# Altium PCB mbed_board.PcbDoc
Units mm, origin at the board's own origin, x right, y up, seen from the top; angles counter-clockwise.
Board outline 84.1 x 66.43 mm, 2 copper layers (Top Layer, Bottom Layer); 18 components, 43 nets, 157 pads, 27 vias.
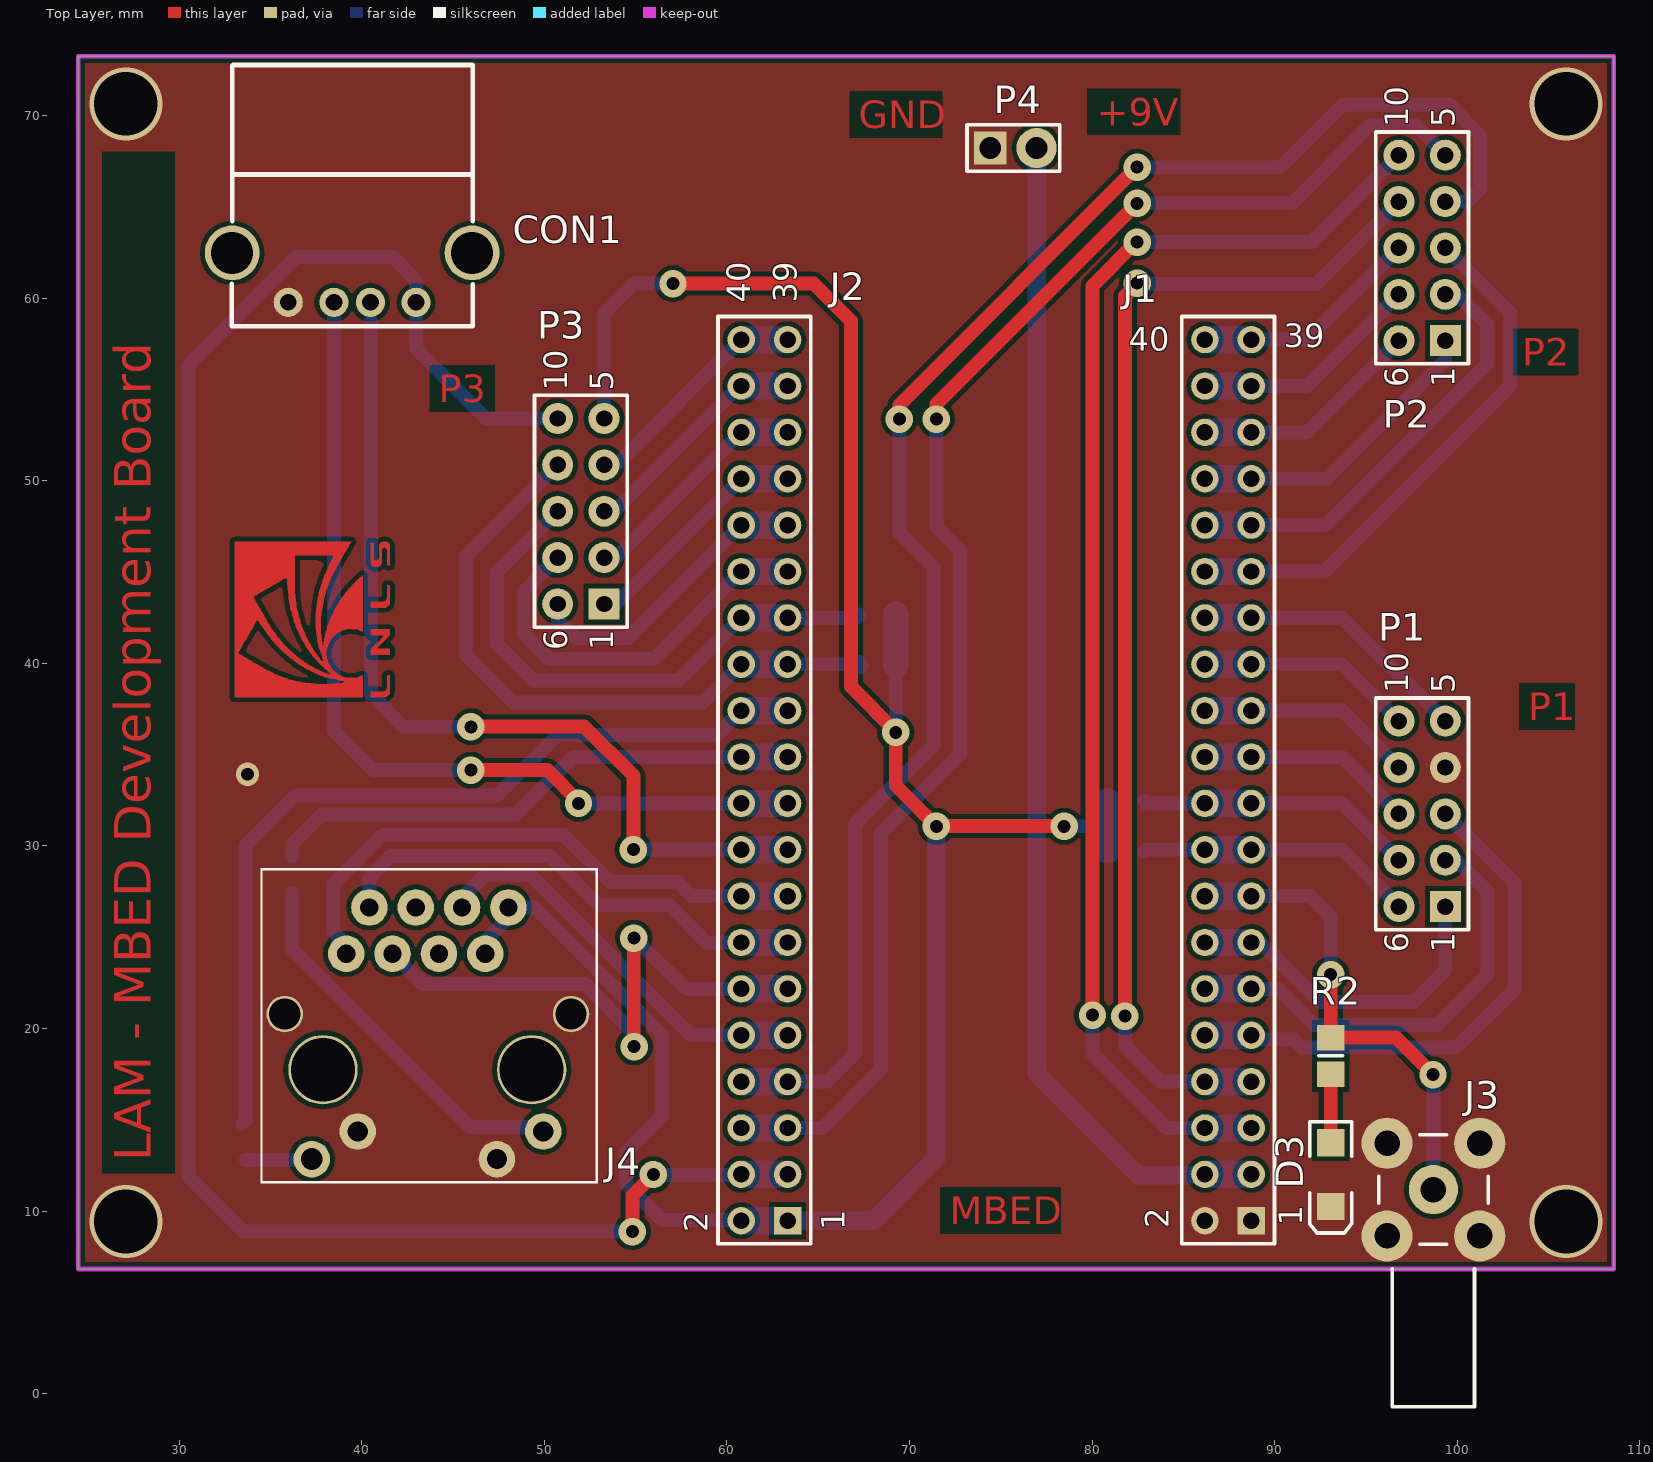
[diagram p0: Top Layer view]
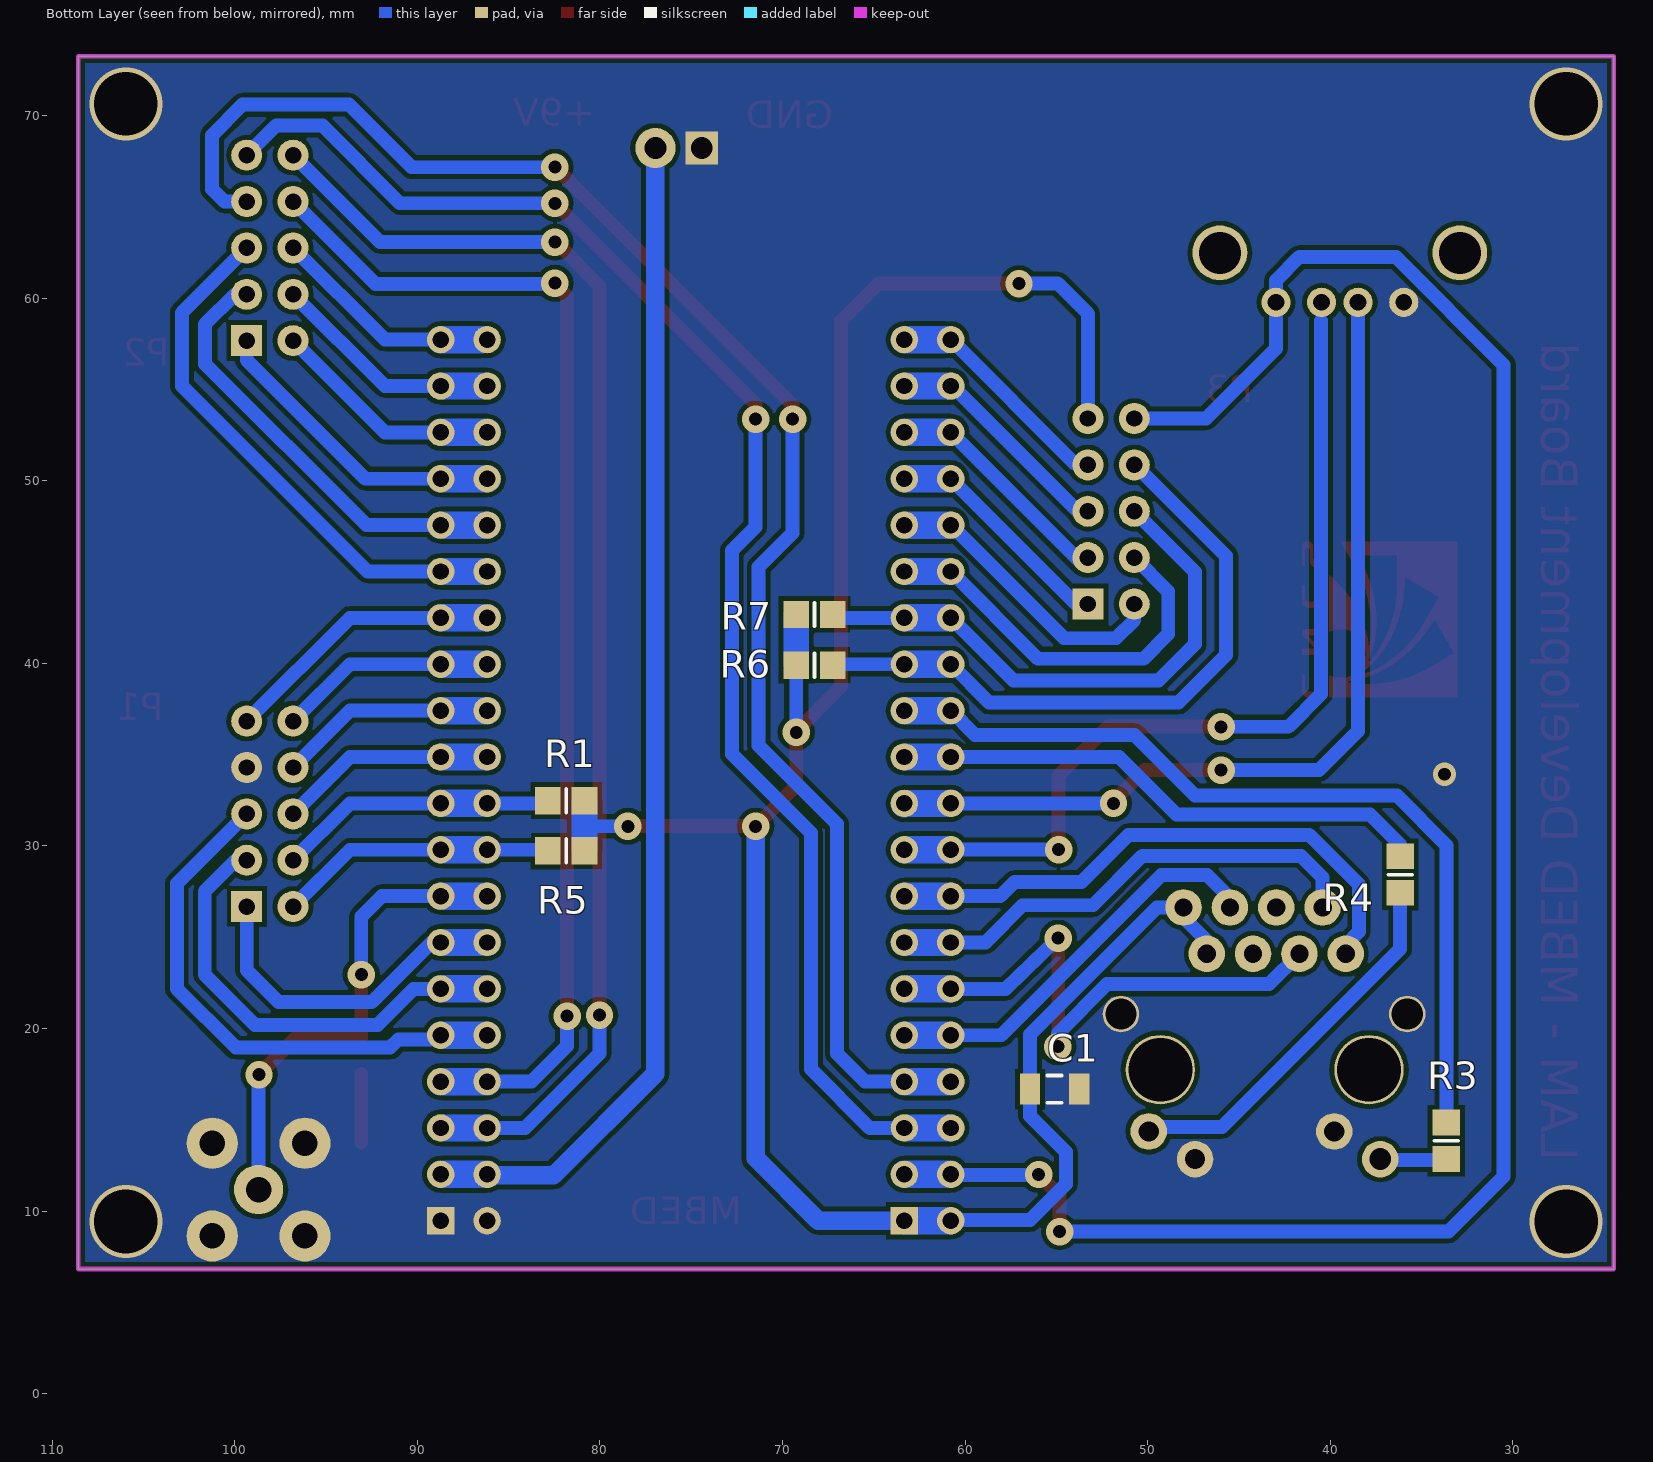
[diagram p1: Bottom Layer view, seen from below]

## Layer stack, top to bottom
Top Layer: signal copper 0.0356
Dielectric: dielectric 0.32, FR-4, Dk 4.8
Bottom Layer: signal copper 0.0356

## Board outline
24.475,6.825 24.475,73.25 108.575,73.25 108.575,6.825

## Design rules (kind name [scope] priority, off if disabled: settings)
Clearance [All] p1: gap=0.254
PlaneConnect [All] p1: planeconnectstyle=Direct reliefexpansion=0.508 reliefentries=4 reliefconductorwidth=0.254 reliefairgap=0.254
PolygonConnect [All] p1: connectstyle=Direct reliefconductorwidth=0.254 reliefentries=4 polygonreliefangle="90 Angle" airgapwidth=0.254
RoomDefinition General_Controller [InComponentClass('General_Controller')] p1: confinementstyle=ConfineIn formatcopy=TRUE lockcomponents=FALSE outline -24.486,-45.8 183.164,-45.8 183.164,132.264 -24.486,132.264
RoutingVias [All] p1: holewidth=0.711 width=1.27 viastyle="Through Hole" minholewidth=0.711 minwidth=1.27 maxholewidth=0.711 maxwidth=1.27
SilkToSolderMaskClearance SilkscreenOverComponentPads [IsPad] p1: minsilkscreentomaskgap=0.254 clearancetoexposedcopper=TRUE
SolderMaskExpansion [All] p1: expansion=0.102
Width [All] p1: maxlimit=2 minlimit=0.254 preferedwidth=0.508
26 further rules are at their usual default settings.

## Components (designator, comment, footprint, x,y, rotation, side; value= is the part's Value field where it differs from the comment)
C1 "Cap Pol3" C1206 55.1,16.675 r180 bottom
CON1 "USBS1ARW-LF" USB_CON_A 39.475,59.775 r0 top
D3 "LED2" 3.2X1.6X1.1 93.075,12 r270 top locked
J1 "Header 20X2" HDR2X20 88.725,9.47 r90 top locked
J2 "Header 20X2" HDR2X20 63.325,9.47 r90 top locked
J3 "CONN SMA" SMA 98.7,11.175 r90 top
J4 "RJ45_J0006D21BNL" RJ45_J0006D21BNL 43.25,19.875 r90 top locked
P1 "Header 5X2A" HDR2X5_CEN#1 99.35,26.675 r90 top
P2 "Header 5X2A" HDR2X5_CEN#1 99.35,57.675 r90 top
P3 "Header 5X2A" HDR2X5_CEN#2 53.275,43.25 r90 top
P4 "Header 2" HDR1X2 74.425,68.225 r0 top
R1 "Res1" 6-0805_M 81.85,32.475 r0 bottom
R2 "Res1" 6-0805_M 93.075,18.5 r270 top locked
R3 "Res1" 6-0805_M 33.65,13.85 r270 bottom
R4 "Res1" 6-0805_M 36.175,28.425 r270 bottom
R5 "Res1" 6-0805_M 81.85,29.725 r0 bottom
R6 "Res1" 6-0805_M 68.25,39.9 r180 bottom
R7 "Res1" 6-0805_M 68.25,42.675 r180 bottom

## Footprints (in the part's own frame and the unit in brackets; to place one, negate y for a bottom-side part, rotate by r counter-clockwise, add the part's x,y. Pads: shape width x height; smd on the part's side, far side on the other; paste and mask are expansions set on the pad)
3.2X1.6X1.1 [mm] "SMT LED; 2 Flat Leads"
  rect 1.5x1.5 smd: 1(-1.75,0) 2(1.75,0)
  silkscreen extent -2.9,-1.15 3.2,1.15
6-0805_M [mm] "Chip Resistor, Body 2.0x1.2mm, IPC Low Density"
  rect 1.4x1.5 smd: 1(-1,0) 2(1,0)
  silkscreen extent 0,-0.65 0,0.65, body extent -1.07,-0.7 1.07,0.7, height 0.7
C1206 [mm] "Chip Capacitor, Body 3.2x1.6mm, IPC High Density"
  rect 1.1x1.7 smd: 1(-1.35,0) 2(1.35,0)
  silkscreen extent -0.4,-0.75 0.4,0.75, body extent -1.7,-0.9 1.7,0.9, height 1.3
HDR1X2 [mm] "Connector; Header; 2 Position"
  rect 1.8x1.8 hole 1.2: 1(0,0)
  round 2.2 hole 1.2: 2(2.54,0)
  silkscreen extent -1.27,-1.27 3.81,1.27
HDR2X5_CEN#1 [mm] "Connector; Header; 5x2 Position"
  rect 1.7x1.7 hole 0.9 unplated: 1(0,0)
  round 1.7 hole 0.9 unplated: 2(2.54,0) 3(5.08,0) 4(7.62,0) 5(10.16,0) 6(0,2.54) 7(2.54,2.54) 8(5.08,2.54) 9(7.62,2.54) 10(10.16,2.54)
  silkscreen extent -1.27,-1.27 11.43,3.81
HDR2X5_CEN#2 [mm] "Connector; Header; 5x2 Position"
  rect 1.7x1.7 hole 0.9: 1(0,0)
  round 1.7 hole 0.9: 2(2.54,0) 3(5.08,0) 4(7.62,0) 5(10.16,0) 6(0,2.54) 7(2.54,2.54) 8(5.08,2.54) 9(7.62,2.54) 10(10.16,2.54)
  silkscreen extent -1.27,-1.27 11.43,3.81
HDR2X20 [mm] "Connector; Header; 20x2 Position"
  rect 1.5x1.5 hole 0.9: 1(0,0)
  round 1.5 hole 0.9: 2(0,2.54) 3(2.54,0) 4(2.54,2.54) 5(5.08,0) 6(5.08,2.54) 7(7.62,0) 8(7.62,2.54) 9(10.16,0) 10(10.16,2.54) 11(12.7,0) 12(12.7,2.54) 13(15.24,0) 14(15.24,2.54) 15(17.78,0) 16(17.78,2.54) 17(20.32,0) 18(20.32,2.54) 19(22.86,0) 20(22.86,2.54) 21(25.4,0) 22(25.4,2.54) 23(27.94,0) 24(27.94,2.54) 25(30.48,0) 26(30.48,2.54) 27(33.02,0) 28(33.02,2.54) 29(35.56,0) 30(35.56,2.54) 31(38.1,0) 32(38.1,2.54) 33(40.64,0) 34(40.64,2.54) 35(43.18,0) 36(43.18,2.54) 37(45.72,0) 38(45.72,2.54) 39(48.26,0) 40(48.26,2.54)
  silkscreen extent -1.27,-1.27 49.53,3.81
RJ45_J0006D21BNL [mm]
  round 2 hole 1: 1(4.216,4.102) 2(6.756,2.832) 3(4.216,1.562) 4(6.756,0.292) 5(4.216,-0.978) 6(6.756,-2.248) 7(4.216,-3.518) 8(6.756,-4.788)
  round 2 hole 1.2: 9(-7.034,5.986)
  round 2 hole 1.1: 10(-5.515,3.467) 11(-7.034,-4.153) 12(-5.515,-6.693)
  round 2 hole 1.7: 13(0.915,7.468) 14(0.915,-8.214)
  round 3.8 hole 3.5: 15(-2.134,5.372) 16(-2.134,-6.058)
  silkscreen extent -8.35,-9.68 8.92,8.8
SMA [mm] "Connector; RF Coaxial, MCX, Thru-Hole; 5 Position; Right-Angle"
  round 2.8 hole 1.4: 1(2.54,2.54) 2(2.54,-2.54) 3(-2.54,-2.54) 4(-2.54,2.54)
  round 2.7 hole 1.4: 5(0,0)
  silkscreen extent -11.9,-3 3,3, body extent -12.58,-3.42 3.4,3.45, height 13.5
USB_CON_A [mm]
  round 1.6 hole 0.92: 1(3.5,0) 2(1,0) 3(-1,0) 4(-3.5,0)
  round 3 hole 2.3: 5(-6.57,2.71) 6(6.57,2.71)
  silkscreen extent -6.6,-1.3 6.6,13, body extent -8.12,-0.97 8.12,13.03, height 7.67

## Part data
C1: "Polarized Capacitor (Surface Mount)"
CON1: library part CON_USB_A, "USB connector A type (Maritex)"
D3: "Typical RED, GREEN, YELLOW, AMBER GaAs LED"
J1 J2: "Header, 20-Pin, Dual row"
J3: library part SMA, "Connector; RF Coaxial, MCX, Thru-Hole; 5 Position; Right-Angle"
J4: "Connector Ethernet RJ45_J0006D21BNL"
P1 P2 P3: "Header, 5-Pin, Dual row"
P4: "Header, 2-Pin"
R1 R2 R3 R4 R5 R6 R7: "Resistor"

## Via types
v1: diameter 1.5, hole 0.711, Top Layer to Bottom Layer, 22 vias
v2: diameter 4, hole 3.5, Top Layer to Bottom Layer, 4 vias
v3: diameter 1.27, hole 0.711, Top Layer to Bottom Layer, 1 vias

## Nets (pads, with @x,y where several pads share a name; then routed paths per layer and width w, separated by ;. In a path a pad name is that pad's centre, name@x,y a point inside that pad or via, vN(x,y) a via of type N, cw(c..) or ccw(c..) an arc to the next point about the centre after c; other vN are vias at no path point)
GND: C1.2 CON1.4 D3.2 J1.1 J1.2 J3.1 J3.2 J3.3 J3.4 J4.10 J4.11 J4.13 J4.14 P1.4 P4.1
  other v2: 27.075,9.425 105.975,9.425 27.075,70.65 105.975,70.65
  other v3: 33.75,33.925
NetC1_1: C1.1 J2.1 J2.2 J4.7 J4.8 P3.5 R1.1 R5.1 R6.1 R7.1 | length 131.7
  Top Layer w0.762: v1(57.05,60.8) 64.75,60.8 66.8,58.75 66.8,38.725 v1@69.3,36.225 ; v1(69.25,36.225) 69.25,33.3 v1(71.475,31.075) 71.5,31.1 v1@78.475,31.1
  Bottom Layer w0.762: J4.7 46.768,24.818 48.038,26.088 J4.8 49.494,26.631 56.45,19.675 56.45,15.2 54.475,13.225 54.475,11.475 56.45,9.5 57.7,9.5 J2.2@60.425,9.5 ; P3.5 53.275,59.15 54.925,60.8 v1@57.175,60.8 ; v1(69.25,36.225) R6.1 ; v1(78.475,31.075) 80.85,31.075 R5.1 R5.1@80.85,30.1
  Bottom Layer w1.016: J2.2@60.425,9.5 60.785,9.5 J2.2@60.815,9.47 ; J2.1 68.045,9.47 71.475,12.9 v1(71.475,31.075)
  Bottom Layer w1.4: R6.1 R7.1 ; R5.1 R1.1
  Bottom Layer w1.5: J2.2@60.815,9.47 J2.1
NetCON1_1: CON1.1 J2.3 J2.4 P3.10 | length 109.5
  Top Layer w0.762: v1(54.825,8.875) 54.825,10.85 v1(55.975,12)
  Bottom Layer w0.762: P3.10 46.815,53.41 42.975,57.25 42.975,60.975 41.7,62.25 36.4,62.25 30.5,56.35 30.5,11.9 33.525,8.875 v1(54.825,8.875) ; v1@55.975,11.979 60.754,11.979 J2.4
  Bottom Layer w1.5: J2.4 J2.3
NetCON1_2: CON1.2 J2.17 J2.18 | length 49.2
  Top Layer w0.762: v1@45.975,36.375 46.15,36.55 52.175,36.55 54.875,33.85 v1(54.875,29.8)
  Bottom Layer w0.762: 40.5,58.75 40.5,38.325 42.3,36.525 v1(45.975,36.525) ; v1(54.875,29.8) J2.18@60.55,29.8
  Bottom Layer w1.016: J2.18@60.55,29.8 60.785,29.8 J2.18@60.795,29.79
  Bottom Layer w1.5: J2.18@60.795,29.79 J2.17
NetCON1_3: CON1.3 J2.19 J2.20 | length 50
  Top Layer w0.762: v1(45.975,34.15) 50.175,34.15 v1@51.935,32.39
  Bottom Layer w0.762: CON1.3 38.475,36.3 40.625,34.15 v1(45.975,34.15) ; v1(51.875,32.33) J2.20
  Bottom Layer w1.5: J2.20 J2.19@63.325,32.316
NetD3_1: D3.1 R2.2 | length 3.7
  Top Layer w0.762: D3.1 R2.2
NetJ1_3: J1.3 J1.4 P4.2 | length 64.8
  Bottom Layer w1.016: P4.2@76.975,68.225 76.975,17.525 82.55,11.95 86.125,11.95 J1.4
  Bottom Layer w1.5: J1.4 J1.3
NetJ1_5: J1.5 J1.6 P2.10 | length 72.3
  Top Layer w0.762: v1(80.025,20.725) 80.025,60.675 v1@82.45,63.1 ; P2.10@96.75,67.775 P2.10
  Bottom Layer w0.762: v1(80.025,20.725) 80.025,18.625 84.1,14.55 J1.6 ; v1(82.475,63.075) 92.05,63.075 P2.10
  Bottom Layer w1.5: J1.6 J1.5
NetJ1_7: J1.7 J1.8 P2.9 | length 66
  Top Layer w0.762: v1(81.8,20.675) 81.8,60.125 v1@82.488,60.812
  Bottom Layer w0.762: v1(81.8,20.675) 81.8,19.05 83.76,17.09 J1.8 ; v1@82.475,60.775 92.29,60.775 P2.9
  Bottom Layer w1.5: J1.8 J1.7
  other v1: 82.475,60.825
NetJ1_9: J1.9 J1.10 P1.3 | length 29.8
  Bottom Layer w0.762: J1.9 88.955,19.4 91.05,19.4 91.5,18.95 99.95,18.95 103.175,22.175 103.175,27.93 P1.3
  Bottom Layer w1.5: J1.10 J1.9
NetJ1_11: J1.11 J1.12 P1.2 | length 25
  Bottom Layer w0.762: J1.11 90.205,22.17 92.175,20.2 98.9,20.2 101.65,22.95 101.65,27.5 99.935,29.215 P1.2
  Bottom Layer w1.5: J1.12 J1.11
NetJ1_13: J1.13 J1.14 P1.1 | length 18.7
  Bottom Layer w0.762: J1.13 89.24,24.71 92.5,21.45 97.6,21.45 99.35,23.2 P1.1
  Bottom Layer w1.5: J1.14 J1.13
NetJ1_15: J1.15 J1.16 J3.5 R2.1 | length 26.7
  Top Layer w0.762: v1(93.075,22.95) R2.1 96.65,19.5 v1(98.675,17.475)
  Bottom Layer w0.762: J1.15 91.95,27.25 93.075,26.125 v1(93.075,22.95) ; v1(98.675,17.475) 98.7,17.45 J3.5
  Bottom Layer w1.5: J1.16 J1.15
NetJ1_17: J1.17 J1.18 P1.6 R5.2 | length 15.3
  Bottom Layer w0.762: R5.2 82.915,29.79 J1.18 ; J1.17 93.695,29.79 P1.6
  Bottom Layer w1.5: J1.18 J1.17
NetJ1_19: J1.19 J1.20 P1.7 R1.2 | length 15.3
  Bottom Layer w0.762: R1.2 82.995,32.33 J1.20 ; J1.19 93.695,32.33 P1.7
  Bottom Layer w1.5: J1.20 J1.19
NetJ1_21: J1.21 J1.22 P1.8 | length 11.9
  Bottom Layer w0.762: J1.21 93.695,34.87 P1.8
  Bottom Layer w1.5: J1.22 J1.21
NetJ1_23: J1.23 J1.24 P1.9 | length 11.9
  Bottom Layer w0.762: J1.23 93.695,37.41 P1.9
  Bottom Layer w1.5: J1.24 J1.23
NetJ1_25: J1.25 J1.26 P1.10 | length 11.9
  Bottom Layer w0.762: J1.25 93.695,39.95 P1.10
  Bottom Layer w1.5: J1.26 J1.25
NetJ1_27: J1.27 J1.28 P1.5 | length 15.5
  Bottom Layer w0.762: J1.27 93.695,42.49 P1.5
  Bottom Layer w1.5: J1.28 J1.27
NetJ1_29: J1.29 J1.30 P2.3 | length 30
  Bottom Layer w0.762: J1.29 92.73,45.03 102.9,55.2 102.9,59.205 P2.3
  Bottom Layer w1.5: J1.30 J1.29
NetJ1_31: J1.31 J1.32 P2.2 | length 24.4
  Bottom Layer w0.762: J1.31@88.87,47.425 J1.31 92.795,47.57 101.625,56.4 101.625,58.575 99.985,60.215 P2.2
  Bottom Layer w1.5: J1.32 J1.31
NetJ1_33: J1.33 J1.34 P2.1 | length 17.9
  Bottom Layer w0.762: 89.69,50.11 J1.33 92.835,50.11 99.35,56.625 P2.1
  Bottom Layer w1.5: J1.34 J1.33
NetJ1_35: J1.35 J1.36 P2.6 | length 12.7
  Bottom Layer w0.762: J1.35 91.785,52.65 P2.6
  Bottom Layer w1.5: J1.36 J1.35
NetJ1_37: J1.37 J1.38 P2.7 | length 12.7
  Bottom Layer w0.762: J1.37 91.785,55.19 P2.7
  Bottom Layer w1.5: J1.38 J1.37
NetJ1_39: J1.39 J1.40 P2.8 | length 14.9
  Bottom Layer w0.762: J1.40 86.196,57.741 88.714,57.741 J1.39 91.785,57.73 P2.8
  Bottom Layer w1.5: J1.40@86.499,57.73 J1.39
NetJ2_5: J2.5 J2.6 P2.5 | length 82.6
  Top Layer w0.762: v1(71.475,53.375) 71.475,54.2 v1(82.475,65.2)
  Bottom Layer w0.762: J2.5 65.225,14.55 68.45,17.775 68.45,30.7 72.775,35.025 72.775,46.175 71.475,47.475 v1(71.475,53.375) ; v1(82.475,65.2) 90.95,65.2 95.2,69.45 97.735,69.45 P2.5
  Bottom Layer w1.5: J2.6 J2.5
NetJ2_7: J2.7 J2.8 P2.4 | length 89.4
  Top Layer w0.762: v1(69.45,53.375) 69.45,54.15 v1(82.475,67.175)
  Bottom Layer w0.762: J2.7 65.49,17.09 66.7,18.3 67.025,18.625 67.025,31.2 71.325,35.5 71.325,45.275 69.45,47.15 v1(69.45,53.375) ; v1(82.475,67.175) 90.325,67.175 93.75,70.6 99.575,70.6 101.25,68.925 101.25,65.975 100.57,65.295 P2.4
  Bottom Layer w1.5: J2.8 J2.7
NetJ2_9: J2.9 J2.10 J4.6 | length 22.5
  Bottom Layer w0.762: J4.6 45.498,27.148 46.75,28.4 49.25,28.4 58.02,19.63 J2.10
  Bottom Layer w1.5: J2.10 J2.9
NetJ2_11: J2.11 J2.12 J4.3 | length 31.3
  Top Layer w0.762: v1@54.9,19 v1(54.9,24.95)
  Bottom Layer w0.762: J4.3 43.354,22.425 52.225,22.425 54.925,19.725 v1(54.925,19) ; v1(54.9,24.95) 57.78,22.17 J2.12
  Bottom Layer w1.5: J2.12 J2.11
NetJ2_13: J2.13 J2.14 J4.2 | length 27
  Bottom Layer w0.762: J4.2 40.418,28.268 41.6,29.45 50.3,29.45 53,26.75 56.85,26.75 58.89,24.71 J2.14 J2.14@60.785,24.753
  Bottom Layer w1.5: J2.14 J2.13
NetJ2_15: J2.15 J2.16 J4.1 | length 31.5
  Bottom Layer w0.762: J4.1 39.148,24.577 38.425,25.3 38.425,27.875 41.15,30.6 51.05,30.6 53.625,28.025 57.3,28.025 58.075,27.25 J2.16
  Bottom Layer w1.5: J2.16 J2.15
NetJ2_21: J2.21 J2.22 R4.1 | length 29.8
  Bottom Layer w0.762: R4.1 36.175,30.075 37.825,31.725 48.425,31.725 51.57,34.87 J2.22
  Bottom Layer w1.5: J2.22 J2.21
NetJ2_23: J2.23 J2.24 R3.1 | length 48
  Bottom Layer w0.762: R3.1@33.475,14.8 33.625,14.95 33.625,30.025 36.35,32.75 47.4,32.75 50.725,36.075 59.45,36.075 J2.24
  Bottom Layer w1.5: J2.24 J2.23
NetJ2_25: J2.25 J2.26 P3.9 R6.2 | length 36
  Bottom Layer w0.762: P3.9@50.695,50.87 45.7,45.875 45.7,40.45 48.3,37.85 58.685,37.85 J2.26 ; J2.25 R6.2@67.2,39.95
  Bottom Layer w1.016: R6.2@67.2,39.95 R6.2
  Bottom Layer w1.5: J2.26 J2.25
NetJ2_27: J2.27 J2.28 P3.8 R7.2 | length 30.8
  Bottom Layer w0.762: P3.8 47.4,44.995 47.4,41.05 49.4,39.05 57.345,39.05 J2.28 ; J2.27 67.065,42.49 R7.2
  Bottom Layer w1.5: J2.28 J2.27
NetJ2_29: J2.29 J2.30 P3.7 | length 21.9
  Bottom Layer w0.762: P3.7 48.875,43.93 48.875,41.6 50.225,40.25 56.005,40.25 J2.30
  Bottom Layer w1.5: J2.30 J2.29
NetJ2_31: J2.31 J2.32 P3.6 | length 16.5
  Bottom Layer w0.762: P3.6 50.735,42.365 51.725,41.375 54.59,41.375 J2.32
  Bottom Layer w1.5: J2.32 J2.31
NetJ2_33: J2.33 J2.34 P3.1 | length 12.7
  Bottom Layer w0.762: P3.1@53.6,42.925 J2.34
  Bottom Layer w1.5: J2.34 J2.33
NetJ2_35: J2.35 J2.36 P3.2 | length 12.7
  Bottom Layer w0.762: P3.2@53.6,45.465 J2.36
  Bottom Layer w1.5: J2.36 J2.35
NetJ2_37: J2.37 J2.38 P3.3 | length 12.9
  Bottom Layer w0.762: P3.3 53.825,48.33 60.685,55.19 J2.38
  Bottom Layer w1.5: J2.38 J2.37
NetJ2_39: J2.39 J2.40 P3.4 | length 12.5
  Bottom Layer w0.762: P3.4@53.275,50.975 54.03,50.975 J2.40
  Bottom Layer w1.5: J2.40@61.099,57.73 J2.39
NetJ4_9: J4.9 R3.2 | length 3.6
  Bottom Layer w0.762: R3.2@33.65,12.8 37.223,12.8 J4.9
NetJ4_12: J4.12 R4.2 | length 21
  Bottom Layer w0.762: R4.2 36.175,24.35 45.918,14.607 49.696,14.607 J4.12
pads on no net: CON1.5 CON1.6 J4.4 J4.5 J4.15 J4.16

## Polygon pours and split planes (outlines as drawn)
GND on Bottom Layer "RFsignal Bottom-No Net" (solid, pour order 4): 24.475,6.825 24.475,73.25 108.575,73.25 108.575,6.825 24.475,6.825
GND on Top Layer "RFsignal Bottom-No Net" (solid, pour order 2): 24.475,73.25 24.475,6.825 108.575,6.825 108.575,73.25 24.475,73.25

## Keep-outs
Keep-Out Layer:
  the board outline again, w0.254

## Other copper
Top Layer:
  region: 40.646,46.604 40.646,45.705 40.668,45.705 40.668,45.684 40.689,45.684 40.689,45.662 40.711,45.662 40.711,45.641 40.732,45.641 40.732,45.619 40.86,45.619 40.86,45.641 40.882,45.641 40.882,45.662 40.903,45.662 40.903,45.684 40.925,45.684 40.925,45.705 40.946,45.705 40.946,46.454 40.967,46.454 40.967,46.518 40.989,46.518 40.989,46.539 41.01,46.539 41.01,46.582 41.032,46.582 41.032,46.604 41.053,46.604 41.053,46.625 41.096,46.625 41.096,46.646 41.138,46.646 41.138,46.668 41.352,46.668 41.352,46.646 41.395,46.646 41.395,46.625 41.438,46.625 41.438,46.604 41.459,46.604 41.459,46.582 41.481,46.582 41.481,46.539 41.502,46.539 41.502,46.497 41.524,46.497 41.524,46.411 41.545,46.411 41.545,45.363 41.395,45.363 41.395,46.24 41.374,46.24 41.374,46.283 41.352,46.283 41.352,46.304 41.331,46.304 41.331,46.325 41.288,46.325 41.288,46.347 41.267,46.347 41.267,46.368 41.181,46.368 41.181,46.325 41.138,46.325 41.138,46.304 41.117,46.304 41.117,46.261 41.096,46.261 41.096,45.491 41.074,45.491 41.074,45.427 41.053,45.427 41.053,45.406 41.032,45.406 41.032,45.363 40.989,45.363 40.989,45.341 40.946,45.341 40.946,45.32 40.925,45.32 40.925,45.299 40.86,45.299 40.86,45.277 40.732,45.277 40.732,45.299 40.668,45.299 40.668,45.32 40.646,45.32 40.646,45.341 40.582,45.341 40.582,45.363 40.561,45.363 40.561,45.384 40.539,45.384 40.539,45.427 40.518,45.427 40.518,45.491 40.497,45.491 40.497,46.604
  region: 41.203,43.373 41.203,43.395 41.31,43.395 41.31,43.416 41.331,43.416 41.331,43.437 41.352,43.437 41.352,43.459 41.374,43.459 41.374,43.566 41.395,43.566 41.395,44.272 41.545,44.272 41.545,43.373 41.524,43.373 41.524,43.245 41.502,43.245 41.502,43.202 41.481,43.202 41.481,43.181 41.459,43.181 41.459,43.159 41.438,43.159 41.438,43.138 41.417,43.138 41.417,43.117 41.395,43.117 41.395,43.095 41.352,43.095 41.352,43.074 41.288,43.074 41.288,43.052 40.497,43.052 40.497,43.373
  region: 40.518,38.474 40.518,38.453 41.181,38.453 41.181,38.474 41.31,38.474 41.31,38.517 41.331,38.517 41.331,38.538 41.352,38.538 41.352,38.56 41.374,38.56 41.374,38.624 41.395,38.624 41.395,39.351 41.545,39.351 41.545,38.453 41.524,38.453 41.524,38.346 41.502,38.346 41.502,38.303 41.481,38.303 41.481,38.282 41.459,38.282 41.459,38.26 41.438,38.26 41.438,38.239 41.417,38.239 41.417,38.218 41.395,38.218 41.395,38.196 41.352,38.196 41.352,38.175 41.288,38.175 41.288,38.132 41.267,38.132 41.267,38.153 40.518,38.153 40.518,38.132 40.497,38.132 40.497,38.474
  region: 41.545,41.854 41.545,41.555 41.524,41.555 41.524,41.533 41.502,41.533 41.502,41.512 41.481,41.512 41.481,41.491 41.459,41.491 41.459,41.469 41.438,41.469 41.438,41.448 41.417,41.448 41.417,41.427 41.395,41.427 41.395,41.405 41.374,41.405 41.374,41.384 41.352,41.384 41.352,41.362 41.331,41.362 41.331,41.341 41.31,41.341 41.31,41.32 41.288,41.32 41.288,41.298 41.267,41.298 41.267,41.277 41.245,41.277 41.245,41.255 41.224,41.255 41.224,41.234 41.203,41.234 41.203,41.213 41.181,41.213 41.181,41.191 41.16,41.191 41.16,41.17 41.138,41.17 41.138,41.148 41.117,41.148 41.117,41.127 41.096,41.127 41.096,41.106 41.074,41.106 41.074,41.084 41.053,41.084 41.053,41.063 41.032,41.063 41.032,41.041 41.01,41.041 41.01,41.02 40.989,41.02 40.989,40.999 40.967,40.999 40.967,40.977 40.946,40.977 40.946,40.956 40.925,40.956 40.925,40.934 40.903,40.934 40.903,40.913 40.882,40.913 40.882,40.892 40.86,40.892 40.86,40.87 40.839,40.87 40.839,40.849 40.818,40.849 40.818,40.806 41.545,40.806 41.545,40.464 40.497,40.464 40.497,40.763 40.518,40.763 40.518,40.785 40.539,40.785 40.539,40.806 40.561,40.806 40.561,40.828 40.582,40.828 40.582,40.849 40.604,40.849 40.604,40.87 40.646,40.87 40.646,40.892 40.668,40.892 40.668,40.913 40.689,40.913 40.689,40.934 40.711,40.934 40.711,40.977 40.732,40.977 40.732,40.999 40.753,40.999 40.753,41.02 40.775,41.02 40.775,41.041 40.796,41.041 40.796,41.063 40.818,41.063 40.818,41.084 40.839,41.084 40.839,41.106 40.86,41.106 40.86,41.127 40.882,41.127 40.882,41.148 40.903,41.148 40.903,41.17 40.925,41.17 40.925,41.191 40.967,41.191 40.967,41.213 40.989,41.213 40.989,41.234 41.01,41.234 41.01,41.277 41.032,41.277 41.032,41.298 41.053,41.298 41.053,41.32 41.074,41.32 41.074,41.341 41.096,41.341 41.096,41.362 41.117,41.362 41.117,41.384 41.138,41.384 41.138,41.405 41.16,41.405 41.16,41.448 41.181,41.448 41.181,41.469 41.203,41.469 41.203,41.491 41.224,41.491 41.224,41.533 40.497,41.533 40.497,41.854
  region: 523 vertices and 3 holes, not listed, extent 33.031,38.132 40.069,46.668
  text "+9V" at 80.25,69.45 h1.52
  text "GND" at 67.225,69.3 h1.52
  text "P2" at 103.575,56.3 h1.52
  text "P3" at 44.225,54.3 h1.52
  text "P1" at 103.9,36.875 h1.52
  text "LAM - MBED Development Board" at 28.45,12.725 h2 r90
  text "MBED" at 72.2,9.275 h1.52

## Text inside footprints (layer, text, board x,y; h text height)
J1: Top Overlay "1" at 91.525,9.2 h1.27 r90; Top Overlay "2" at 84.2,9.05 h1.27 r90; Top Overlay "40" at 82.025,57.125 h1.27; Top Overlay "39" at 90.5,57.3 h1.27
J2: Top Overlay "1" at 66.45,8.95 h1.27 r90; Top Overlay "2" at 58.95,8.825 h1.27 r90; Top Overlay "40" at 61.293,59.762 h1.27 r90; Top Overlay "39" at 63.833,59.762 h1.27 r90
P1: Top Overlay "6" at 97.318,24.135 h1.27 r90; Top Overlay "10" at 97.318,38.359 h1.27 r90; Top Overlay "5" at 99.858,38.359 h1.27 r90; Top Overlay "1" at 99.858,24.135 h1.27 r90
P2: Top Overlay "6" at 97.318,55.135 h1.27 r90; Top Overlay "10" at 97.318,69.359 h1.27 r90; Top Overlay "5" at 99.858,69.359 h1.27 r90; Top Overlay "1" at 99.858,55.135 h1.27 r90
P3: Top Overlay "6" at 51.243,40.71 h1.27 r90; Top Overlay "10" at 51.243,54.934 h1.27 r90; Top Overlay "5" at 53.783,54.934 h1.27 r90; Top Overlay "1" at 53.783,40.71 h1.27 r90